# EAGLE board rev_e (EAGLE 8.6.0)
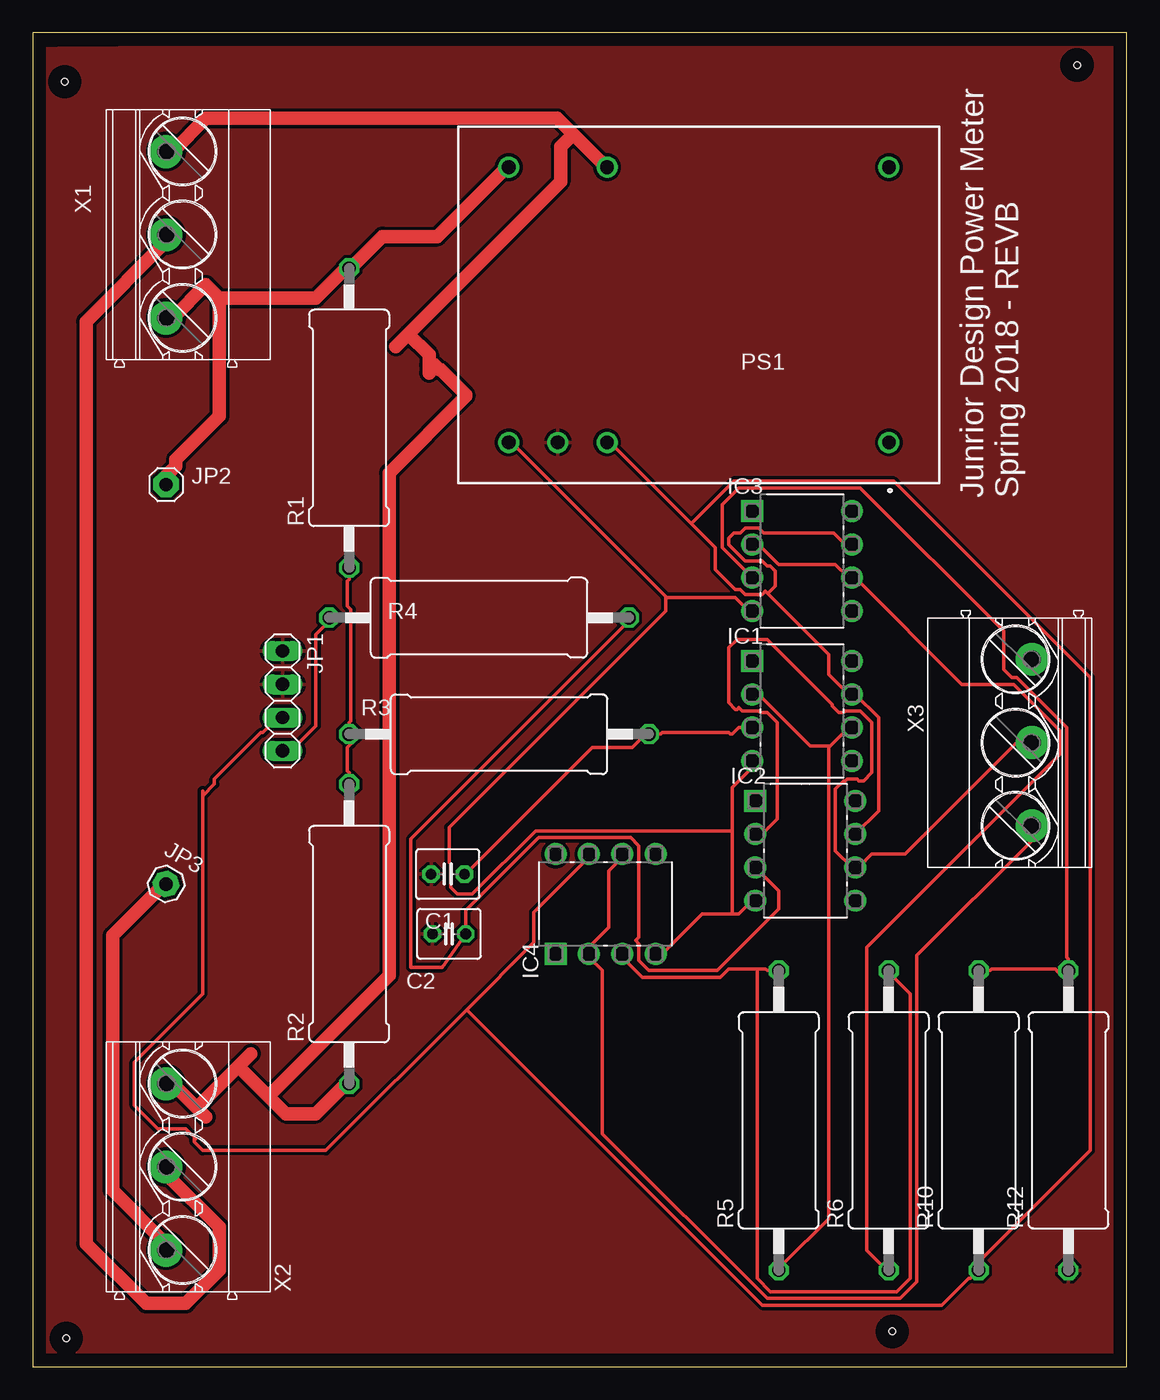
[diagram p0: board, top side]
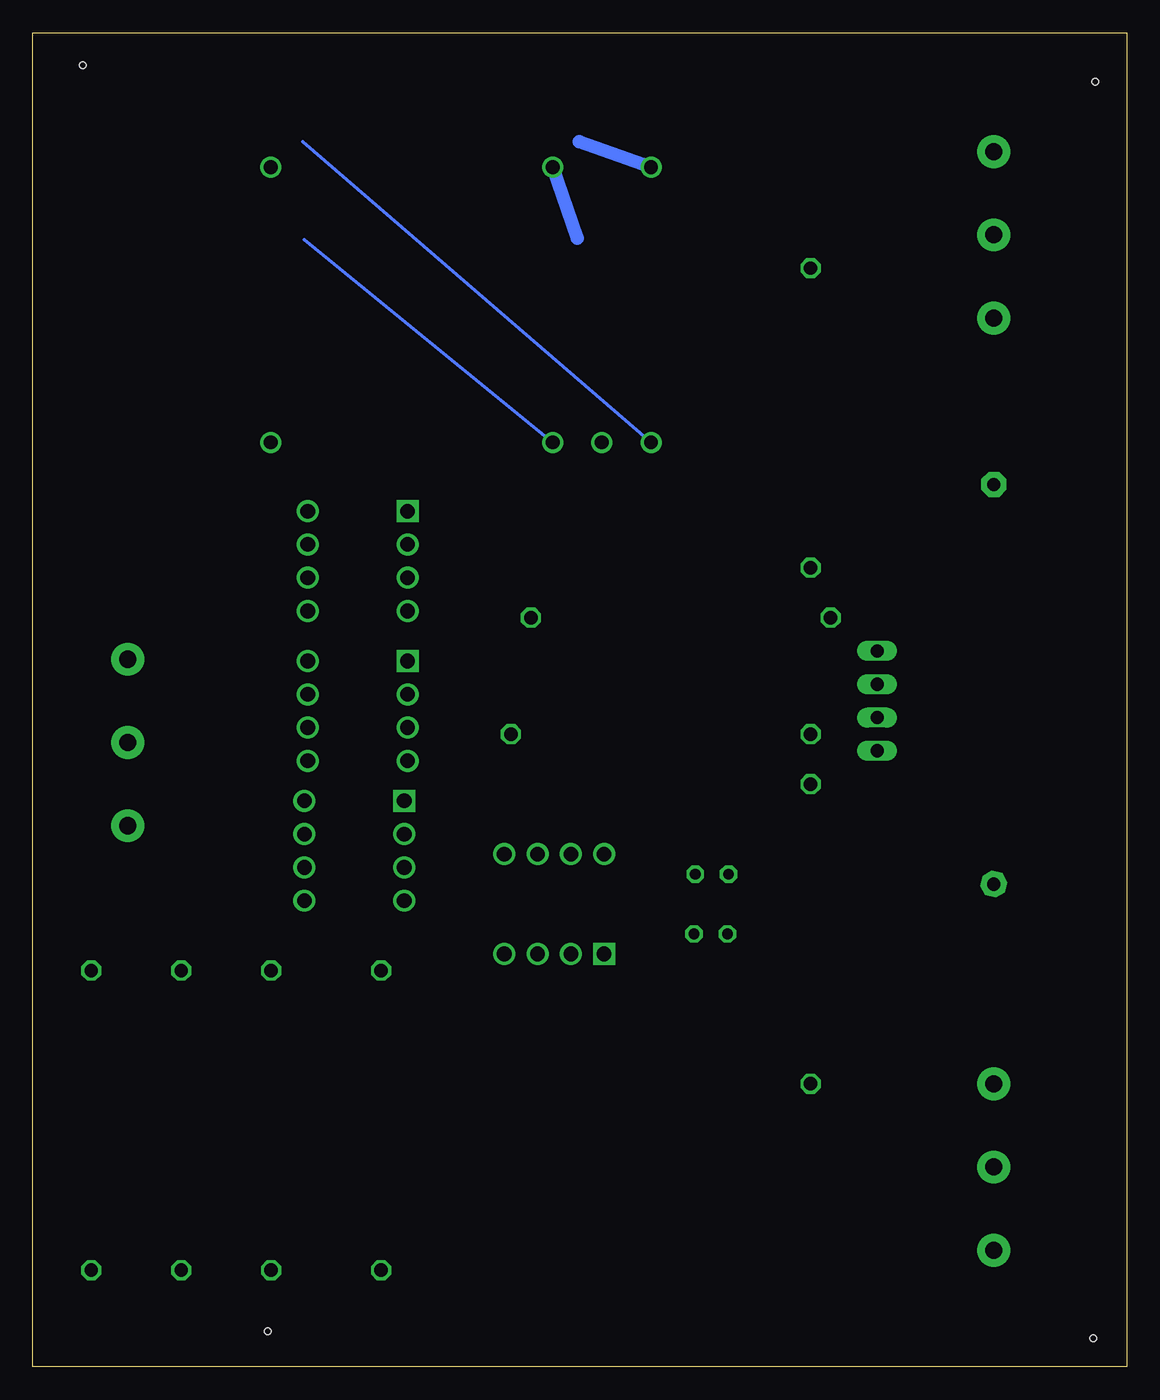
[diagram p1: board, bottom side, seen from below]

Size 83.46 x 101.78 mm. Coordinates in mm from the lower left corner, seen from the top.
Outline: 0,0 83.46,0 83.46,101.78 0,101.78 0,0
Copper layers 1: Top 0.5mm
Design rules "default *": minimum track width 6mil, minimum drill 0.35mm, track to track 10mil, track to pad 10mil, pad to pad 10mil, via to via 10mil, smd to smd 10mil, copper to edge 40mil, drill to drill 6mil, minimum pad ring 10mil, minimum via ring 8mil, stop-mask expansion 4mil, vias tented up to drill 0mil, thermal gap 10mil
Net classes: 0 Standard: width 0.254 mm, clearance 0.254 mm; 1 High Voltage: width 1.016 mm, clearance 1.016 mm
Holes 0.51 mm at 79.65,99.32 2.56,2.18 2.43,98.05 65.55,2.69

## Footprints (pad centres in the part's own frame; a part is rotated, then mirrored left to right if it is on the bottom)
C025-040X050 = drill 0.813 octagon: 1 -1.27,0; 2 1.27,0
DIP254P762X508-8 = drill 1.118 pad 1.676 square: 1 -7.62,7.62 | drill 1.118 pad 1.676: 2 -7.62,5.08; 3 -7.62,2.54; 4 -7.62,0; 5 0,0; 6 0,2.54; 7 0,5.08; 8 0,7.62
1X04 = drill 1.016 long: 1 -3.81,0; 2 -1.27,0; 3 1.27,0; 4 3.81,0
1X01 = drill 1.016 pad 1.93 octagon: 1 0,0
RAC04-0512DC230 = drill 1.05 pad 1.6: 1 -14.5,10.5; 2 7,10.5; 3 10.75,10.5; 4 14.5,10.5; 5 14.5,-10.5; 6 7,-10.5; 7 -14.5,-10.5
0617/22 = drill 1.016 octagon: 1 -11.43,0; 2 11.43,0
MKDS_5/3-635 = drill 1.3 pad 2.5: 1 -6.35,0; 2 0,0; 3 6.35,0

## Placement (x,y rotation side)
C1  26.525n  [C025-040X050]  31.65,37.58 180 top
C2  26.525n  [C025-040X050]  31.75,33.02 180 top
IC1  LM741CN  [DIP254P762X508-8]  62.48,46.23 0 top
IC2  LM741CN  [DIP254P762X508-8]  62.74,35.56 0 top
IC3  LM741CN  [DIP254P762X508-8]  62.48,57.66 0 top
IC4  LM741CN  [DIP254P762X508-8]  47.5,39.12 90 top
JP1  [1X04]  19.05,50.8 270 top
JP2  [1X01]  10.16,67.31 0 top
JP3  [1X01]  10.16,36.83 329.8 top
PS1  RAC04-05DC_230  [RAC04-0512DC230]  50.8,81.03 180 top
R1  10.67Meg  [0617/22]  24.13,72.39 90 top
R2  100k  [0617/22]  24.13,33.02 90 top
R3  100k  [0617/22]  35.56,48.26 0 top
R4  100k  [0617/22]  34.04,57.15 0 top
R5  20k  [0617/22]  56.9,18.8 90 top
R6  10k  [0617/22]  65.28,18.8 90 top
R10  3k  [0617/22]  72.14,18.8 90 top
R12  2k  [0617/22]  78.99,18.8 90 top
X1  MKDS_5/3-6,35  [MKDS_5/3-635]  10.16,86.36 90 top
X2  MKDS_5/3-6,35  [MKDS_5/3-635]  10.16,15.24 90 top
X3  MKDS_5/3-6,35  [MKDS_5/3-635]  76.21,47.63 270 top

## Library data of the parts
C1 C2 = resistor; MPN: MC0805B224K500A5.08MM; OC_NEWARK: 46P6280
IC1-IC4 = SamacSys_Parts; ARROW_PART_NUMBER: LM741CN; ARROW_PRICE/STOCK: http://uk.rs-online.com/web/p/products/4718749; DESCRIPTION: OP AMP; HEIGHT: mm; MANUFACTURER_NAME: National Semiconductor; MANUFACTURER_PART_NUMBER: LM741CN; RS_PART_NUMBER: 4718749; RS_PRICE/STOCK: http://uk.rs-online.com/web/p/products/4718749
JP1 = pinhead
JP2 JP3 = adafruit
PS1 = SamacSys_Parts; DESCRIPTION: Recom 4W Dual Output Embedded Switch Mode Power Supply SMPS, 400mA, 5V dc; HEIGHT: mm; MANUFACTURER_NAME: RECOM Power; MANUFACTURER_PART_NUMBER: RAC04-05DC/230; RS_PART_NUMBER: 1666726; RS_PRICE/STOCK: http://uk.rs-online.com/web/p/products/1666726
R1 = resistor; OC_NEWARK: unknown
R2 = resistor; MPN: MFR3-100KFC; OC_NEWARK: 78R4845
R3 R4 = resistor; MPN: MFR3-1K0FC; OC_NEWARK: 78R4838
R5 = resistor; MPN: MFR4-20KFI; OC_NEWARK: 78R4890
R6 = resistor; MPN: CCF5510K0FKE36; OC_NEWARK: 71M1030
R10 = resistor; MPN: MFR4 3K3 1%; OC_NEWARK: 97K4870
R12 = resistor; MPN: MFR4-2K0FI; OC_NEWARK: 78R4886
X1 X2 = con-phoenix-mkds_5; MF: FARNELL; MPN: 1714968; OC_FARNELL: 3704695; OC_NEWARK: 71C4092
X3 = con-phoenix-mkds_5; MF: FARNELL; MPN: 1714968; OC_FARNELL: 3704695; OC_NEWARK: 71C4092; SPICEPREFIX: X

## Nets
CURRENT_LPF_OUT: IC2.2 IC2.6 X3.2
CURRENT_SENSOR: JP1.4 R4.1
DC_OFFSET: IC3.2 IC3.6 R6.1
GND: C1.2 C2.2 JP1.1 JP1.2 PS1.3 R12.1
GROUND [High Voltage]: X1.2 X2.2
HOT_WIRE_IN [High Voltage]: JP2.1 PS1.5 R1.2 X1.1
HOT_WIRE_OUT [High Voltage]: JP3.1 X2.1
MICRO_VREAD: IC4.2 IC4.6 X3.3
N$1: C1.1 IC1.3 R3.2
N$6: C2.1 IC2.3 R4.2
N$8: IC4.3 R5.2 R6.2
N$11: IC3.3 R10.2 R12.2
NEUTRAL [High Voltage]: PS1.6 R2.1 X1.3 X2.3
V+: IC1.7 IC2.7 IC3.7 IC4.7 JP1.3 PS1.2 R10.1
V-: IC1.4 IC2.4 IC3.4 IC4.4 PS1.4
VOLT_LPF_OUT: IC1.2 IC1.6 R5.1
VOLT_SENSOR: R1.1 R2.2 R3.1

## Tracks (layer width: path | path; a pad name or v marks a point on that pad's centre or on a via)
CURRENT_LPF_OUT
  Top 0.254: IC2.2 55.63,40.64 56.77,41.78 56.77,49.15 56.01,49.91 55.5,49.91 55.37,50.04 54.1,50.04 53.85,50.29 53.72,50.16 53.59,50.16 53.09,50.67 53.09,54.86 53.72,55.5 56.01,55.5 60.96,50.55 60.96,50.42 61.47,49.91 61.85,49.91 61.98,50.04 63.12,50.04 64.01,49.15 64.01,45.34 63.37,44.7 62.99,44.7 62.87,44.83 62.1,44.83 61.98,44.7 61.85,44.7 61.21,44.07 61.21,39.37 62.48,38.1 IC2.6 62.99,38.1 64.01,39.12 66.55,39.12 75.06,47.62 X3.2
CURRENT_SENSOR
  Top 0.254: JP1.4 19.68,46.99 21.59,48.9 21.59,55.88 22.61,56.9 R4.1
DC_OFFSET
  Top 0.254: R6.1 64.9,7.75 64.77,7.75 63.63,8.89 63.63,32 78.36,46.74 78.36,48.51 74.8,52.07 70.87,52.07 62.74,60.2 IC3.6 62.23,60.2 61.21,61.21 56.9,61.21 55.37,62.74 IC3.2
GND
  pour Top: -2.79,100.58 -2.54,0 91.19,0.25 90.17,101.35
GROUND
  Top 1.016: X2.2 10.16,14.73 14.22,10.67 14.22,7.37 11.68,4.83 8.64,4.83 4.06,9.4 4.06,79.76 10.16,85.85 X1.2
HOT_WIRE_IN
  Top 1.016: 14.22,81.53 21.59,81.53 23.88,83.82 R1.2 24.51,84.07 26.67,86.23 30.86,86.23 36.07,91.44 36.2,91.44 PS1.5 | 14.22,81.53 13.21,82.55 10.67,80.01 X1.1 | JP2.1 10.16,67.94 10.92,68.71 10.92,69.22 14.22,72.52 14.22,81.53
  Bottom 1.016: 41.78,93.47 PS1.5
HOT_WIRE_OUT
  Top 1.016: JP3.1 9.91,36.58 9.78,36.58 6.1,32.89 6.1,13.46 10.16,9.4 X2.1
MICRO_VREAD
  Top 0.254: IC4.6 44.96,38.86 43.94,37.85 43.94,33.53 42.42,32 IC4.2 42.42,31.24 43.43,30.23 43.43,17.78 56.01,5.21 66.17,5.21 67.44,6.48 67.44,31.37 76.2,40.13 X3.3
N$1
  Top 0.254: C1.1 33.02,37.59 42.67,47.24 45.72,47.24 46.74,48.26 R3.2 47.88,48.26 48.01,48.39 53.09,48.39 53.21,48.26 53.34,48.26 53.85,48.77 IC1.3
N$6
  Top 0.254: R4.2 45.47,56.9 28.83,40.26 28.83,30.48 31.24,30.48 C2.1 33.02,34.8 38.61,40.39 45.59,40.39 46.23,39.75 46.23,32.77 45.97,32.51 46.23,32.26 46.23,30.99 46.99,30.23 52.2,30.23 56.9,34.92 56.9,36.32 IC2.3
N$8
  Top 0.254: R5.2 56.01,30.23 55.88,30.35 55.24,30.35 | 55.24,30.35 53.09,30.35 52.45,29.72 46.48,29.72 44.96,31.24 IC4.3 | R6.2 65.66,29.84 65.66,29.72 66.93,28.45 66.93,6.73 65.91,5.71 56.26,5.71 55.24,6.73 55.24,30.35
N$11
  Top 0.254: R10.2 73.03,30.23 73.15,30.35 77.98,30.35 78.23,30.1 78.87,30.1 R12.2 78.99,31.11 78.87,31.24 78.87,48.77 75.06,52.58 74.68,52.58 74.04,53.21 74.04,56.13 63.12,67.06 53.85,67.06 52.58,65.79 52.58,62.48 IC3.3
NEUTRAL
  Top 1.016: 12.51,19.75 10.67,21.59 X2.3 | 12.51,19.75 13.21,19.05 | 41.21,94.04 40.01,95.25 13.21,95.25 10.67,92.71 X1.3 | 41.21,94.04 43.69,91.57 PS1.6 | 28.64,78.8 40.26,90.42 40.26,93.09 41.21,94.04 | 28.64,78.8 27.69,77.85 | 12.51,19.75 15.68,22.92 | 15.68,22.92 16.64,23.88 | 30.23,76.45 30.23,77.22 28.64,78.8 | 30.23,76.45 30.23,75.82 | R2.1 23.88,21.59 21.59,19.3 19.3,19.3 17.97,20.64 | 15.68,22.92 17.97,20.64 | 17.97,20.64 27.18,29.84 27.18,68.2 33.02,74.04 33.02,74.17 31.11,76.07 30.99,76.07 30.61,76.45 30.23,76.45
  Bottom 1.016: 41.91,86.11 PS1.6
V+
  Top 0.254: 12.95,43.56 12.95,28.45 7.75,23.24 7.75,19.94 9.53,18.16 11.68,18.16 12.38,17.46 | 12.95,43.56 12.95,43.94 | 12.45,17.4 12.38,17.46 | 12.95,43.56 13.84,44.45 13.84,44.83 17.4,48.39 17.53,48.39 18.67,49.53 JP1.3 | 12.38,17.46 12.32,17.4 12.32,17.14 12.95,16.51 22.35,16.51 33.08,27.24 | 50.23,64.33 52.07,62.48 52.07,60.83 53.59,59.31 53.98,59.31 54.36,58.93 55.63,58.93 55.88,59.18 56.07,58.99 | 50.23,64.33 44.07,70.48 43.81,70.48 PS1.2 | 56.07,58.99 60.71,54.36 60.71,52.83 62.23,51.31 IC1.7 62.74,51.31 64.52,49.53 64.52,42.42 IC2.7 | IC3.7 61.98,62.74 61.09,63.63 55.75,63.63 55.37,64.01 54.36,64.01 53.98,63.63 53.47,63.63 53.09,63.25 53.09,62.74 54.36,61.47 55.63,61.47 56.01,61.09 56.26,61.09 56.64,60.71 56.64,59.56 56.07,58.99 | 33.08,27.24 38.23,32.38 38.23,34.67 42.42,38.86 IC4.7 | 33.08,27.24 55.63,4.7 69.34,4.7 71.37,6.73 71.5,6.73 R10.1 72.14,8 80.64,16.51 80.64,52.58 65.66,67.56 53.47,67.56 50.23,64.33
  Bottom 0.254: 62.74,85.98 PS1.2
V-
  Top 0.254: IC4.4 48.01,31.5 51.05,34.54 53.34,34.54 | 53.34,34.54 53.85,34.54 54.86,35.56 IC2.4 | IC1.4 54.86,45.72 53.34,44.2 53.34,40.89 | 53.34,34.54 53.34,40.89 | 48.32,58.74 48.39,58.67 53.59,58.67 54.61,57.66 IC3.4 | 48.32,58.74 36.58,70.48 36.32,70.48 PS1.4 | 53.34,40.89 38.35,40.89 33.53,36.07 32.38,36.07 31.88,36.58 31.88,38.35 31.75,38.48 31.75,41.15 48.26,57.66 48.26,58.67 48.32,58.74
  Bottom 0.254: 62.87,93.47 PS1.4
VOLT_LPF_OUT
  Top 0.254: R5.1 57.28,7.75 57.28,7.87 60.71,11.3 60.71,47.24 60.77,47.31 | 60.77,47.31 62.23,48.77 IC1.6 | IC1.2 55.37,51.31 59.31,47.37 60.71,47.37 60.77,47.31
VOLT_SENSOR
  Top 0.254: R2.2 24.13,45.34 24,45.47 24,47.24 24.26,47.5 24.26,48.13 R3.1 24.13,49.15 24.26,49.28 24.26,57.78 24,58.04 24,59.94 24.13,60.07 R1.1

## Text on the board
tNames: Junrior Design Power Meter / Spring 2018 - REVB